# Altium PCB DACN.PcbDoc
Units mil, origin at the board's own origin, x right, y up, seen from the top; angles counter-clockwise.
Board outline 4210.03 x 2570.03 mil, 2 copper layers (Top Layer, Bottom Layer); 54 components, 48 nets, 231 pads, 0 vias.
Unrouted connection lines stored in the file: 10.
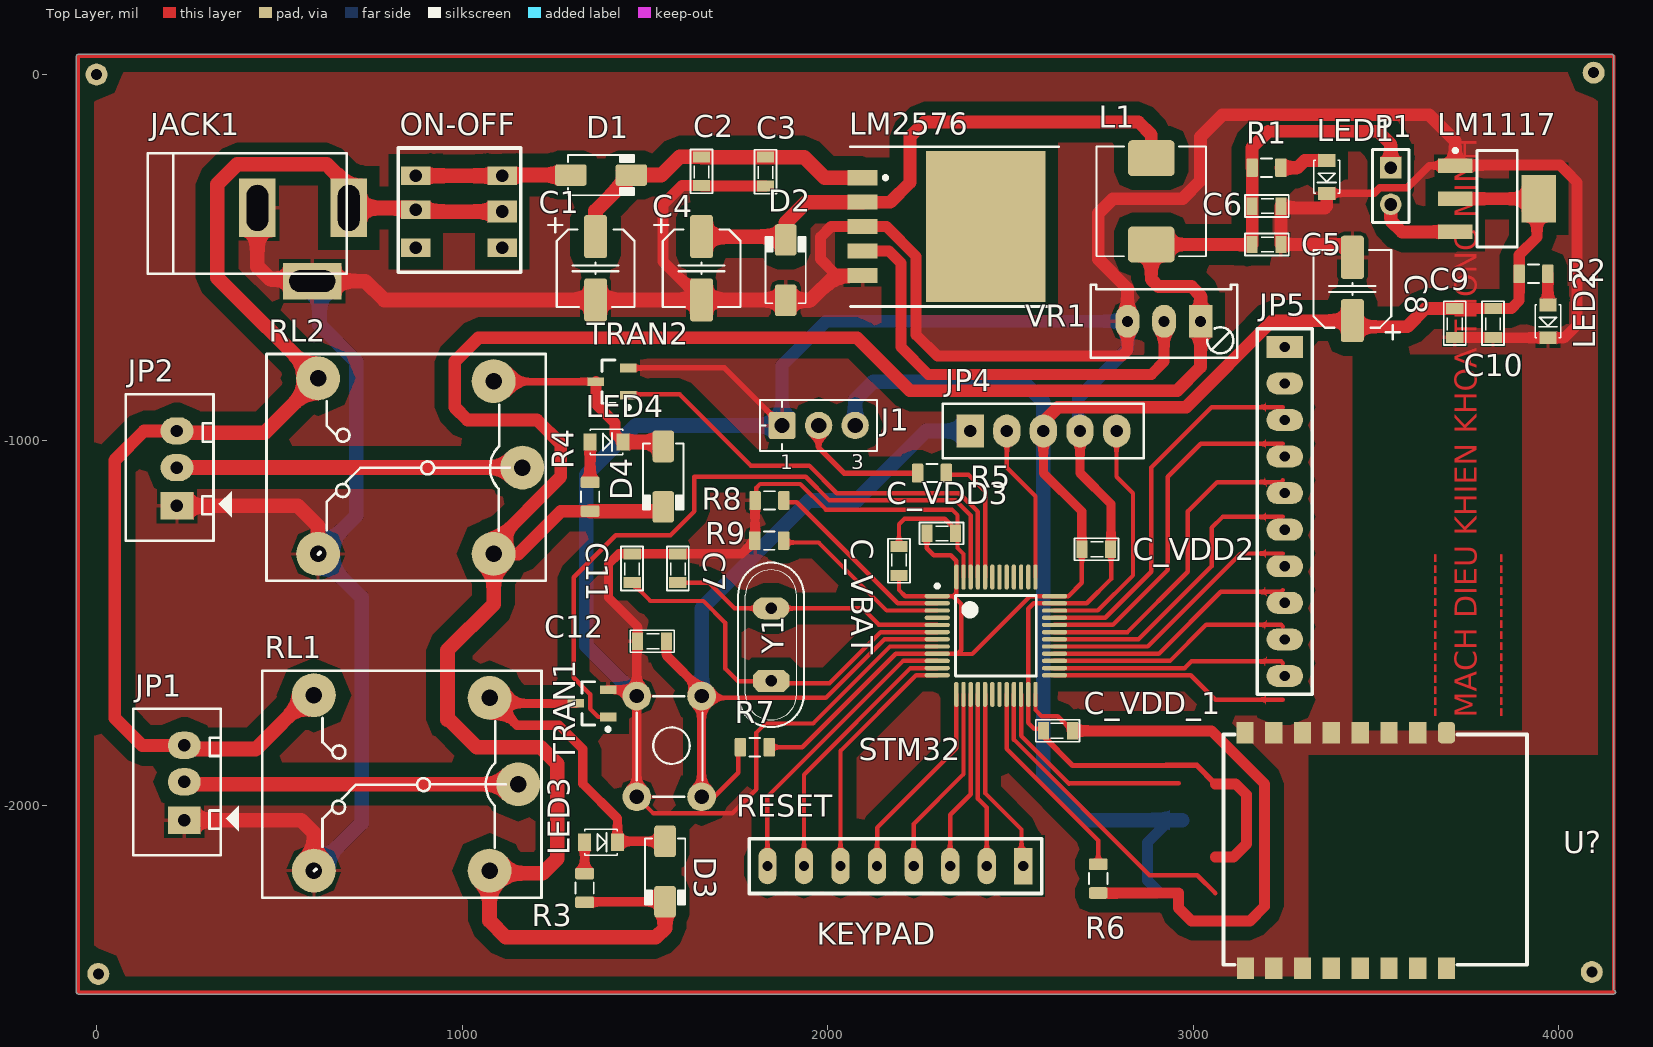
[diagram p0: Top Layer view]
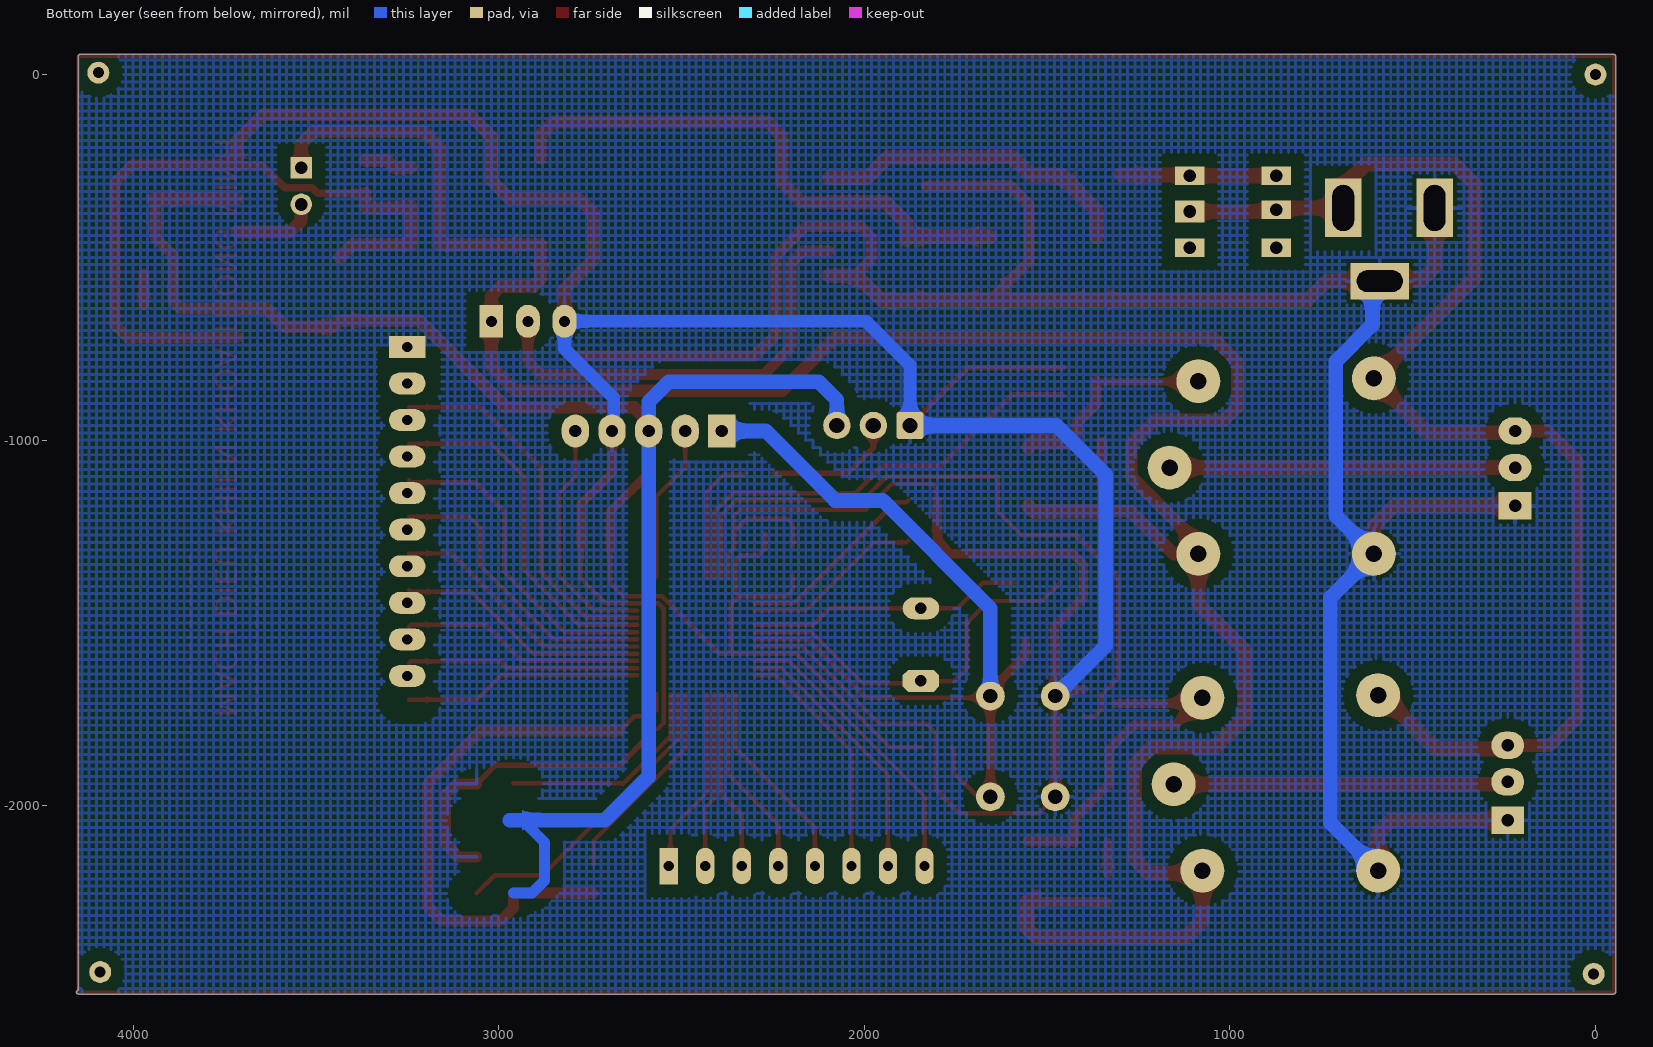
[diagram p1: Bottom Layer view, seen from below]
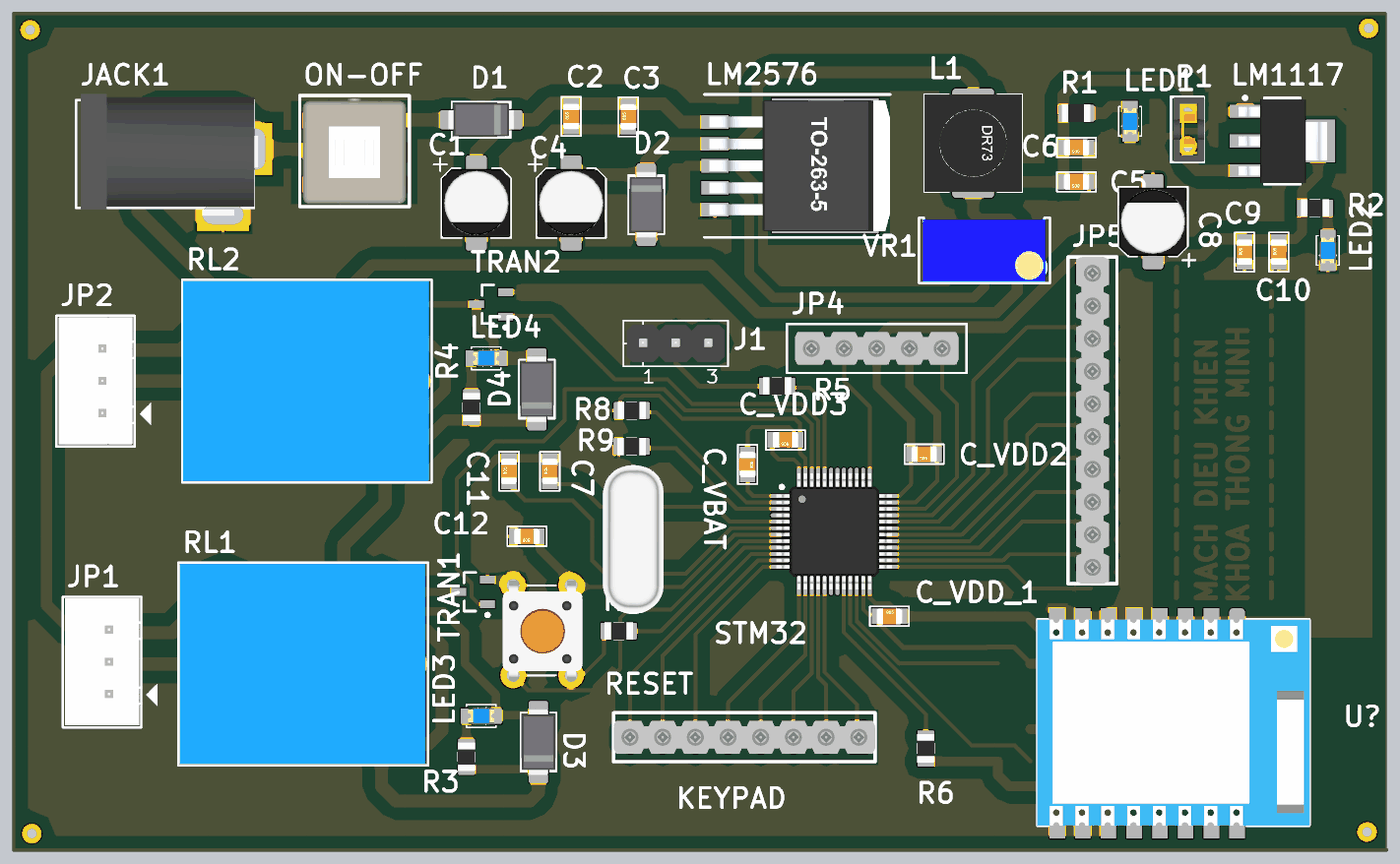
[diagram p2: 3D render of the assembled board from above, using the file's embedded part models]

## Layer stack, top to bottom
Top Solder: solder mask 0.4, Solder Resist, Dk 3.5
Top Layer: signal copper 1.4
Dielectric 1: dielectric 12.6, FR-4, Dk 4.8
Bottom Layer: signal copper 1.4
Bottom Solder: solder mask 0.4, Solder Resist, Dk 3.5

## Board outline
-50,-2515.01 cw(c-50,-2510) -55.01,-2510 -55.01,50 cw(c-50,50) -50,55.02 4145,55.02 cw(c4145,50) 4150.01,50 4150.01,49.94 ccw(c4145,50) 4150.02,50 4150.01,49.94 4150.02,-2504.99 cw(c4150,-2510) 4155.02,-2510 cw(c4150,-2510) 4150,-2515.01

## Design rules (kind name [scope] priority, off if disabled: settings)
Clearance [All] p1: gap=35 ignorepadtopadclearanceinfootprint=FALSE
PlaneConnect [All] p1: planeconnectstyle=Relief reliefexpansion=20 reliefentries=4 reliefconductorwidth=30 reliefairgap=10
PolygonConnect [All] p1: connectstyle=Relief reliefconductorwidth=10 reliefentries=4 polygonreliefangle="90 Angle" airgapwidth=10
RoutingVias [All] p1: holewidth=28 width=50 viastyle="Through Hole" minholewidth=28 minwidth=50 maxholewidth=28 maxwidth=50
SolderMaskExpansion [All] p1: expansion=4
Width [All] p1: maxlimit=30 minlimit=12 preferedwidth=30 toplayer_prefwidth=15 minimp=50.000000 maximp=50.000000 favimp=50.000000
29 further rules are at their usual default settings.

## Components (designator, comment, footprint, x,y, rotation, side; value= is the part's Value field where it differs from the comment)
C1 "10µF" CAP_ELEC_5x5.7 1365,-530 r90 top
C2 "105" SM-CAP-0805 1655,-310 r90 top value=0,1uF/300V
C3 "104" SM-CAP-0805 1830,-311 r90 top value=0,1uF/300V
C4 "10µF" CAP_ELEC_5x5.7 1655,-530 r90 top
C5 "105" SM-CAP-0805 3246,-465 r180 top value=0,1uF/300V
C6 "104" SM-CAP-0805 3246,-360 r180 top value=0,1uF/300V
C7 "20pF" SM-CAP-0805 1590,-1396 r90 top value=0,1uF/300V
C8 "10µF" CAP_ELEC_5x5.7 3435,-586.61 r270 top
C9 "105" SM-CAP-0805 3715,-725 r90 top value=0,1uF/300V
C10 "104" SM-CAP-0805 3820,-725 r90 top value=0,1uF/300V
C11 "20pF" SM-CAP-0805 1465,-1396 r90 top value=0,1uF/300V
C12 "100nF" SM-CAP-0805 1565,-1550 r180 top value=0,1uF/300V
C_VBAT "104" SM-CAP-0805 2195,-1285 r270 top value=0,1uF/300V
C_VDD2 "104" SM-CAP-0805 2780,-1298.5 r180 top value=0,1uF/300V
C_VDD3 "104" SM-CAP-0805 2356,-1255 r180 top value=0,1uF/300V
C_VDD_1 "104" SM-CAP-0805 2584,-1795 r0 top value=0,1uF/300V
D1 "Diode  1N4007" DO-214AC 1380,-275 r0 top value=1N4007
D2 "Diode  1N4007" DO-214AC 1885,-535 r90 top value=1N4007
D3 "Diode  1N4007" DO-214AC 1555,-2180 r270 top value=1N4007
D4 "Diode  1N4007" DO-214AC 1550,-1100 r270 top value=1N4007
J1 "CONN_HEADER_1x3P_0.100in" 1x3POS_HEADER 1975,-960 r90 top value="Single-row, 3 positions"
JACK1 "JACK DC" "JACK DC" 565,-465 r0 top value="Jac DC"
JP1 "JP3" CON3 240,-2035 r90 top value="Connector 3"
JP2 "JP3" CON3 220,-1175 r90 top value="Connector 3"
JP4 "JP5" jam5 2390,-975 r180 top value="Connector 5"
JP5 "JP 10" jam10 3250,-745 r270 top
KEYPAD "JP8" jam8 2535,-2165 r180 top value="Connector 8"
L1 "10µ" IND_WW_DR73 2885,-346.89 r270 top
LED1 "LED SMD" SM-LED-0805-Blue 3365,-235 r270 top
LED2 "LED SMD" SM-LED-0805-Blue 3970,-630 r270 top
LED3 "LED SMD" SM-LED-0805-Blue 1335,-2100 r0 top
LED4 "LED SMD" SM-LED-0805-Blue 1350,-1005 r0 top
LM1117 "LM1117-adj" SOT223-4N 3830.83,-340 r0 top value=LM317
LM2576 "LM2576S" TS5B 2266.1,-416.1 r270 top
ON-OFF "SW 6 PIN" SW6 1087,-475 r180 top
P1 "HEADER" "JUMPER PITCH 2 PIN" 3540,-255 r270 top
R1 "Jumper" RESC2012N_ZERO 3200,-255 r0 top value=1K
R2 "Jumper" RESC2012N_ZERO 3930.63,-545 r0 top value=1K
R3 "Jumper" RESC2012N_ZERO 1335,-2225 r90 top value=1K
R4 "Jumper" RESC2012N_ZERO 1350,-1155 r90 top value=1K
R5 "Jumper" RESC2012N_ZERO 2285,-1090 r0 top value=1K
R6 "Jumper" RESC2012N_ZERO 2740,-2199.37 r90 top value=1K
R7 "Jumper" RESC2012N_ZERO 1800.63,-1840 r0 top value=100K
R8 "Jumper" RESC2012N_ZERO 1840.63,-1165 r180 top value=10K
R9 "Jumper" RESC2012N_ZERO 1840,-1275 r180 top value=10K
RESET "SWITCH" "SW 4PIN" 1477.83,-1975.59 r90 top
RL1 "Relay" RL_SPDT_10A 1153.74,-1941.22 r180 top value="Relay SPDT, 10A, 12V"
RL2 "Relay" RL_SPDT_10A 1165,-1075 r180 top value="Relay SPDT, 10A, 12V"
STM32 "STM32F103C8T6-LQFP48" "LQFP 48 PIN" 2460,-1535 r0 top
TRAN1 "C1815" C1815 1355,-1720 r180 top
TRAN2 "C1815" C1815 1410,-840 r180 top
U? "ESP-07" ESP8266-07 3692.48,-1800 r270 top
VR1 "10K" VR1 3020,-675 r180 top
Y1 "8 MHz" "CRYSTAL DIP" 1845,-1560 r90 top

## Footprints (in the part's own frame and the unit in brackets; to place one, negate y for a bottom-side part, rotate by r counter-clockwise, add the part's x,y. Pads: shape width x height; smd on the part's side, far side on the other; paste and mask are expansions set on the pad)
1x3POS_HEADER [mil] "Connector Header, Single-row 3-position, 0.100\" pitch"
  rrect25% 75x75 hole 42: 1(0,100)
  round 75 hole 42: 2(0,0) 3(0,-100)
  silkscreen extent -70,-160 70,160, body extent -57,-150 57,150, height 335
C1815 [mm] "SOT23, 3-Leads, Body 2.9x1.3mm, Pitch 0.95mm, Lead Span 2.4mm, IPC Medium Density"
  rect 1.15x0.6 smd: 1(-1.125,0.95) 2(-1.125,-0.95) 3(1.125,0)
  silkscreen extent -1.25,-1.5 0.7,1.92, body extent -0.7,-1.5 0.7,1.5, height 1.14
CAP_ELEC_5x5.7 [mm] "Capacitor, polarized, aluminum can; 5x5.7mm DxH"
  round 0.508 on Mech15: 0(0,0)
  rrect25% 3x1.6 smd: 1(2.2,0) 2(-2.2,0)
  silkscreen extent -2.7,-2.7 3.5,3.3, body extent -2.65,-2.65 2.65,2.65, height 5.7
CON3 [mil] "CON 3 - Header White"
  rect 75x90 hole 34: 1(-5,0)
  oval 75x90 hole 34: 2(100,0) 3(200,0)
  silkscreen extent -100,-150 300,140, body extent -94,-94 296,133, height 276
"CRYSTAL DIP" [mm]
  oct 1.524x2.54 hole 0.8: 1(-2.5,0)
  oval 1.524x2.54 hole 0.8: 2(2.54,0)
  silkscreen extent -5.71,-2.29 5.71,2.29, body extent -5.63,-2.35 5.72,2.3, height 3.5
DO-214AC [mm] "JEDEC DO214 variation AC. SMA"
  round 0.508 on Mech15: 0(0,0)
  rrect25% 2.2x1.5 smd: A(-2.1,0) K(2.1,0)
  silkscreen extent -2.3,-1.4 2.3,1.4, body extent -2.6,-1.3 2.6,1.3, height 2.42
ESP8266-07 [mm]
  rrect50% 1.5x1.2 smd: 1(0,0)
  rect 1.5x1.2 smd: 2(0,-2) 3(0,-4) 4(0,-6) 5(0,-8) 6(0,-10) 7(0,-12) 8(0,-14) 9(16.383,-13.97) 10(16.383,-12) 11(16.383,-10) 12(16.383,-8) 13(16.383,-6) 14(16.383,-4) 15(16.383,-2) 16(16.383,0)
  silkscreen extent 0.13,-15.49 16.13,5.59, body extent 0.13,-15.55 16.13,5.65, height 3.6
IND_WW_DR73 [mm] "Wire-wound power inductor, Cooper Bussmann DR73 series, IPC Medium Density"
  round 0.5 on Mech15: 0(0,0)
  rrect25% 2.5x3.25 smd: 1(-3,0) 2(3,0)
  silkscreen extent -3.81,-3.81 3.81,3.81, body extent -3.8,-3.8 3.8,3.8, height 3.55
"JACK DC" [mil] "Jac DC input"
  rect 100x160 hole 59.06 slot 125.98 at 90 deg: 1(125,100) 2(-125,100)
  rect 160x100 hole 59.06 slot 125.98 at 0 deg: 3(25,-100)
  silkscreen extent -425,-80 120,250, body extent -410,-105 134,269, height 434
jam5 [mil]
  rect 75x90 hole 34: 1(0,0)
  oval 75x90 hole 34: 2(-100,0) 3(-200,0) 4(-300,0) 5(-400,0)
  silkscreen extent -475,-75 75,75, body extent -450,-50 50,50, height 704
jam8 [mil]
  rect 50x100 hole 28: 1(0,0)
  oval 50x100 hole 28: 2(100,0) 3(200,0) 4(300,0) 5(400,0) 6(500,0) 7(600,0) 8(700,0)
  silkscreen extent -50,-75 750,75, body extent -50,-50 750,50, height 704
jam10 [mil]
  rect 60x100 hole 28: 1(0,0)
  oval 60x100 hole 28: 2(100,0) 3(200,0) 4(300,0) 5(400,0) 6(500,0) 7(600,0) 8(700,0) 9(800,0) 10(900,0)
  silkscreen extent -50,-75 950,75, body extent -50,-50 950,50, height 704
"JUMPER PITCH 2 PIN" [mm] "Connector; Header; 2 Position"
  rect 1.5x1.5 hole 0.9: 1(0,0)
  round 1.5 hole 0.9: 2(2.54,0)
  silkscreen extent -1.27,-1.27 3.81,1.27, body extent -1.27,-1.27 3.81,1.33, height 7.6
"LQFP 48 PIN" [mm] "TSQFP, 48-Leads, Body 9.2x9.2mm (max), Pitch 0.50mm, IPC Medium Density"
  oval 1.75x0.3 smd: 1(-4.075,2.75) 2(-4.075,2.25) 3(-4.075,1.75) 4(-4.075,1.25) 5(-4.075,0.75) 6(-4.075,0.25) 7(-4.075,-0.25) 8(-4.075,-0.75) 9(-4.075,-1.25) 10(-4.075,-1.75) 11(-4.075,-2.25) 12(-4.075,-2.75) 25(4.075,-2.75) 26(4.075,-2.25) 27(4.075,-1.75) 28(4.075,-1.25) 29(4.075,-0.75) 30(4.075,-0.25) 31(4.075,0.25) 32(4.075,0.75) 33(4.075,1.25) 34(4.075,1.75) 35(4.075,2.25) 36(4.075,2.75)
  oval 0.3x1.75 smd: 13(-2.75,-4.075) 14(-2.25,-4.075) 15(-1.75,-4.075) 16(-1.25,-4.075) 17(-0.75,-4.075) 18(-0.25,-4.075) 19(0.25,-4.075) 20(0.75,-4.075) 21(1.25,-4.075) 22(1.75,-4.075) 23(2.25,-4.075) 24(2.75,-4.075) 37(2.75,4.075) 38(2.25,4.075) 39(1.75,4.075) 40(1.25,4.075) 41(0.75,4.075) 42(0.25,4.075) 43(-0.25,4.075) 44(-0.75,4.075) 45(-1.25,4.075) 46(-1.75,4.075) 47(-2.25,4.075) 48(-2.75,4.075)
  silkscreen extent -4.2,-2.8 2.8,3.57, body extent -4.5,-4.5 4.5,4.5, height 1.45
RESC2012N_ZERO [mm] "Chip Resistor, Body 2.0x1.2mm, 0805, IPC Medium Density"
  round 0.254 on Mech15: 0(0,0)
  rrect25% 0.8x1.3 smd: 1(-1,0) 2(1,0)
  Top Layer pour cut-out: -0.725,0.65 -0.525,0.85 0.525,0.85 0.725,0.65 0.725,-0.65 0.525,-0.85 -0.525,-0.85 -0.725,-0.65
  silkscreen extent -0.38,-0.64 0.38,0.64, body extent -1.1,-0.67 1.1,0.68, height 0.69
RL_SPDT_10A [mil] "Relay SPDT, 5 pin, 10A,W 650mil, L 800mil, H 800mil"
  round 120 hole 45: 1(0,0) 2(559.06,236.22) 3(559.06,-243.78) 4(78.74,-236.22) 5(78.74,236.22)
  silkscreen extent -63,-311 700,310, body extent -55,-306 697,304, height 602
SM-CAP-0805 [mil]
  rect 30x47.24 smd: 1(6,0) 2(85,0)
  silkscreen extent -15,-30 105,30, body extent 6,-25 84,25, height 31
SM-LED-0805-Blue [mm]
  rect 0.9x1.2 smd: 1(0,0) 2(2.286,0)
  silkscreen extent 0,-0.89 2.29,0.89, body extent 0.13,-0.62 2.15,0.63, height 1.1
SOT223-4N [mm] "SOT223, 4-Leads, Body 6.5x3.5mm, Pitch 2.3mm, Lead Span 7mm, IPC Medium Density"
  rect 2.4x1 smd: 1(-2.9,2.3) 2(-2.9,0) 3(-2.9,-2.3)
  rect 2.4x3.3 smd: 4(2.9,0)
  silkscreen extent -3.02,-3.35 1.4,3.47, body extent -3.39,-3.27 3.5,3.23, height 1.72
SW6 [mil]
  rect 80x50 hole 35: 1(-23,-1) 3(-23,-198) 4(214,-198) 5(214,-105) 6(214,-1)
  rect 80x60 hole 35: 2(-23,-100)
  silkscreen extent -73,-274 262,66, body extent -62,-265 252,57, height 524
"SW 4PIN" [mm] "SW button 4pin, 250 x250 mil"
  round 2 hole 1: 1(0,0) 1(7,0) 2(0,-4.5) 2(7,-4.5)
  silkscreen extent 0,-4.57 6.98,0, body extent -0.52,-5.39 7.38,0.81, height 7
TS5B [mm]
  rect 1.05x2.1 smd: 1(-3.399,-4.346) 2(-1.699,-4.346) 3(0.001,-4.346) 4(1.701,-4.346) 5(3.401,-4.346)
  rect 10.5x8.3 smd: 6(0,4.225)
  silkscreen extent -5.55,-5.18 5.55,9.28, body extent -5.08,-4.77 5.08,9.24, height 4.58
VR1 [mil] "Variable Resistor"
  rect 65x90 hole 30: 1(0,0)
  oval 65x90 hole 30: 2(100,0) 3(200,0)
  silkscreen extent -100,-100 301,100, body extent -87,-94 289,96, height 455

## Part data
C1 C4 C8: library part "CAP Aluminum"
  C1 C4: =470µF
  C8: =100µF
C2 C3 C5 C6 C7 C9 C10 C11 C12 C_VBAT C_VDD2 C_VDD3 C_VDD_1: library part "CAP SMD", Designed by=VanDungEvn
D1 D2 D3 D4: "Diode 1A"
J1: "Pin Header, THT, Single-row, 2.54mm pitch", Manufacturer 1=3M, Manufacturer Part Number 1=929647-09-36-I, Package / Case="Pin header; 2.54mm pitch", Category=Connectors, Mounting Type="Through Hole", Pitch="0.100\" (2.54mm)", QtyOverride=0.1, SCDType=undef, Terminal Block Type="Header, Male Pins, Single"
JP1 JP2: library part Con3, "Connector 3"
JP4: library part "jam 5", "jam 5"
JP5: library part "jam 10", "jam 10"
KEYPAD: library part "jam 8", "jam 8"
L1: library part INDC_10u_DR73-100-R, "Inductor Power 10µH 2.1A 7.6x7.6mm SMD", Manufacturer 1="Cooper Bussmann", Manufacturer Part Number 1=DR73-100-R, Package / Case=5.0x5.0x4.5mm, Ratings="2.1 A", Supplier Part Number 1=513-1129-1-ND, Tolerance=±20%, ComponentLink1Description=http://www.cooperindustries.com/content/dam/public/bussmann/Electronics/Resources/Data%20Sheets/Bus_Elx_DS_4315_DR_Series.pdf, ComponentLink1URL=http://www.cooperindustries.com/content/dam/public/bussmann/Electronics/Resources/Data%20Sheets/Bus_Elx_DS_4315_DR_Series.pdf, Material="ferrite shielded", SCDType=spec, Supplier 1=Digi-Key
LED1 LED2 LED3 LED4: library part "LED SMD 0805"
LM1117: "3v3"
LM2576: "Simple Switcher 3A Step Down Voltage Regulator", ComponentLink1Description="Manufacturer Link", ComponentLink1URL=http://www.national.com/, ComponentLink2Description=Datasheet, ComponentLink2URL=http://www.national.com/ds.cgi/LM/LM2576.pdf, ComponentLink3Description="URL Link1", ComponentLink3URL=http://www.national.com/pf/LM/LM2576.html, DatasheetVersion=Jun-1999, Note="Tab is connected to GND", PackageDescription="D2-PAK; 5 Leads; Body 14.4 (inc. leads) x 10.4 mm (LxW max)", PackageReference=TS5B, Published=15-Apr-2002, Publisher="Altium Limited"
P1: library part "HEADER CONNECT"
R1 R2 R3 R4 R5 R6 R7 R8 R9: library part RES_0805, "Resistor SMD chip 0.0 Ohm 0.125W 0805", Manufacturer 1="Samsung Electro-Mechanics America, Inc", Manufacturer 2="Stackpole Electronics Inc", Manufacturer 3=Yageo, Manufacturer 4="Panasonic Electronic Components", Manufacturer 5="Rohm Semiconductor", Manufacturer Part Number 1=RC2012J000CS, Manufacturer Part Number 2=RMCF0805ZT0R00, Manufacturer Part Number 3=RC0805JR-070RL, Manufacturer Part Number 4=ERJ-6GEY0R00V, Manufacturer Part Number 5=MCR10ERTJ000, Package / Case="0805 (2012 metric)", Ratings=1/8W, Supplier Part Number 1=1276-5466-6-ND, Tolerance=N/A, ComponentLink1Description=http://www.samsungsem.com/servlet/FileDownload?filename=productcatalog/pdf/Chip_Resistor.pdf, ComponentLink1URL=http://www.samsungsem.com/servlet/FileDownload?filename=productcatalog/pdf/Chip_Resistor.pdf, ComponentLink2Description=http://www.seielect.com/Catalog/SEI-RMCF_RMCP.pdf, ComponentLink2URL=http://www.seielect.com/Catalog/SEI-RMCF_RMCP.pdf, ComponentLink3Description=http://media.digikey.com/pdf/Data%20Sheets/Yageo%20PDFs/RC0805%20Pb%20Free.pdf, ComponentLink3URL=http://media.digikey.com/pdf/Data%20Sheets/Yageo%20PDFs/RC0805%20Pb%20Free.pdf, ComponentLink4Description=http://industrial.panasonic.com/www-cgi/jvcr13pz.cgi?E+PZ+3+AOA0001+ERJ6GEY0R00V+7+WW, ComponentLink4URL=http://industrial.panasonic.com/www-cgi/jvcr13pz.cgi?E+PZ+3+AOA0001+ERJ6GEY0R00V+7+WW, ComponentLink5Description=http://rohmfs.rohm.com/en/products/databook/datasheet/passive/resistor/chip_resistor/mcr_g.pdf, ComponentLink5URL=http://rohmfs.rohm.com/en/products/databook/datasheet/passive/resistor/chip_resistor/mcr_g.pdf, RoHS 1="RoHS Compliant", RoHS 2="RoHS Compliant", RoHS 3="RoHS Compliant", RoHS 4="RoHS Compliant", RoHS 5="RoHS Compliant", SCDType=spec, Supplier 1=Digi-Key, Supplier 2=Digi-Key, Supplier 3=Digi-Key, Supplier 4=Digi-Key, Supplier 5=Digi-Key, Supplier Part Number 2=RMCF0805ZT0R00DKR-ND, Supplier Part Number 3=311-0.0ARDKR-ND, Supplier Part Number 4=P0.0ADKR-ND, Supplier Part Number 5=RHM0.0CPDKR-ND
RL1 RL2: library part "Relay SRD", "Relay SPDT 5 Pin", ="Relay SPDT, 10A, 24V"
TRAN1 TRAN2: "NPN 600mW, ECB", =C2383
VR1: library part VR, "Var Resistor RM065", RM065-103=1K, RM065-104=10K, RM065-503=5K
Y1: library part Crystal, LatestRevisionDate=17-Jul-2002, LatestRevisionNote="Re-released for DXP Platform.", PackageReference=R38, Published=8-Jun-2000, Publisher="Altium Limited"
RESET: LatestRevisionDate=17-Jul-2002, LatestRevisionNote="Re-released for DXP Platform.", PackageReference=SPST-2, Published=24-Mar-1999, Publisher="Altium Limited"
STM32: ComponentLink1Description="Manufacturer Link", ComponentLink1URL=www.st.com/stm32, ComponentLink2Description=Datasheet, ComponentLink2URL=http://www.st.com/stonline/products/literature/ds/13586.pdf, DatasheetVersion="rev6, Mar-2008", PackageDescription="48-Pin Low-Profile Quad Flat Pack, 7 x 7 mm Body, 0.5 mm Pitch (LQFP48)", PackageReference=LQFP48, PackageVersion=Mar-2008, Published=30-May-2008, Publisher="Altium Limited"

## Free pads (board coordinates)
  round 60 hole 30: 14(4095,5) 15(4090,-2455) 16(5,-2460) 20(0,0)

## Nets (pads, with @x,y where several pads share a name; then routed paths per layer and width w, separated by ;. In a path a pad name is that pad's centre, name@x,y a point inside that pad or via, vN(x,y) a via of type N, cw(c..) or ccw(c..) an arc to the next point about the centre after c; other vN are vias at no path point)
+3.3V: C8.1 C9.2 C10.2 C_VBAT.2 C_VDD2.2 C_VDD3.2 C_VDD_1.2 J1.3 JP4.3 LM1117.2 LM1117.4 R2.1 R6.1 R7.2 STM32.1 STM32.9 STM32.24 STM32.36 STM32.48 | length 8096.8
  Top Layer w12: R7.2 1930,-1840 2185.79,-1584.21 STM32.9 2355.79,-1584.21 ; C_VBAT.2 2195,-1410 2211.73,-1426.73 STM32.1 2343.27,-1426.73 ; C_VDD3.2 2271,-1296 2290,-1315 2336.73,-1315 2351.73,-1330 STM32.48 2351.73,-1418.27 2343.27,-1426.73 ; STM32.24 2568.27,-1738.27 2585,-1755 2629,-1755 C_VDD_1.2 ; C_VDD2.2 2695,-1390 2658.27,-1426.73 STM32.36 2553.27,-1426.73 2395,-1585 2356.57,-1585 2355.79,-1584.21 ; 2343.27,-1426.73 2365,-1448.46 2365,-1575 2355.79,-1584.21
  Top Layer w25: JP4.3 2590,-1090 2695,-1195 C_VDD2.2
  Top Layer w30: C_VDD_1.2 3050,-1795 3195,-1940 3195,-2275 3155,-2315 2995,-2315 2960,-2280 2960,-2239 2740.37,-2239 R6.1@2740,-2239.37 ; C9.2 C10.2 3870,-640 3891.26,-618.74 R2.1 3891.26,-493.74 3940,-445 3940,-345 LM1117.4
  Top Layer w35: JP4.3 2590,-950 2630,-910 2980,-910 3216.77,-673.23 C8.1 3451.77,-690 3585,-690 3635,-640 C9.2 ; LM1117.2 LM1117.4
  Bottom Layer w30: 2935.5,-2039.5 2875,-2100 2875,-2205 2909,-2239 2960,-2239
  Bottom Layer w40: J1.3 2075,-890 2125,-840 2535,-840 2590,-895 JP4.3 2590,-1920 2709.5,-2039.5 2935.5,-2039.5 2960,-2039.5 2970,-2039.5
+12V: JACK1.1 JP1.3 JP2.3 ON-OFF.2 ON-OFF.5 RL1.3 RL2.3 | length 3537.9
  Top Layer w35: JP2.3 130,-975 50,-1055 50,-1760 125,-1835 JP1.3
  Top Layer w40: JP2.3 225,-980 460,-980 605.94,-834.06 RL2.3 330,-555.28 330,-299.75 384.75,-245 630,-245 690,-305 JACK1.1 868,-365 ON-OFF.5 878,-375 ON-OFF.2 ; JP1.3 250,-1845 435,-1845 582.56,-1697.44 RL1.3
Boot0: R5.2 STM32.44 | length 361.1
  Top Layer w12: R5.2 2329.37,-1095 2385,-1095 2430.47,-1140.47 STM32.44
BOOT1: R6.2 STM32.20 | length 568.3
  Top Layer w12: STM32.20 2489.53,-1844.53 2740,-2095 R6.2
ESP_RX: STM32.21 | length 848.4
  Top Layer w12: STM32.21 2509.21,-1819.21 2880,-2190 3011,-2190 3060,-2239
ESP_TX: STM32.22 | length 599.3
  Top Layer w12: STM32.22 2528.9,-1808.9 2660,-1940 2661,-1939 2960,-1939
GND: C1.2 C2.1 C3.1 C4.2 C5.1 C6.1 C7.2 C8.2 C9.1 C10.1 C11.2 C12.2 C_VBAT.1 C_VDD2.1 C_VDD3.1 C_VDD_1.1 D2.A J1.1 JACK1.2 JACK1.3 JP1.1 JP2.1 JP4.4 LED1.2 LED2.2 LM1117.1 LM2576.3 LM2576.5 R8.2 R9.2 RESET.1 RL1.2 RL2.2 STM32.8 STM32.23 STM32.35 STM32.47 TRAN1.2 TRAN2.2 VR1.3 | length 18770.1
  Top Layer w12: RESET.1@1477.83,-1975.59 1523.2,-2020.96 1739.04,-2020.96 1805,-1955 1805,-1800 1830,-1775 1960,-1775 2170.47,-1564.53 STM32.8 ; R8.2 1805,-1161.26 1805,-1130 1815,-1120 1925,-1120 1995,-1190 2340,-1190 2355,-1205 C_VDD3.1@2355,-1245 ; C_VBAT.1 2195,-1230 2210,-1215 2320,-1215 2350,-1245 C_VDD3.1@2355,-1245 ; STM32.47 2371.42,-1311.42 2355,-1295 C_VDD3.1@2355,-1245 ; C_VDD_1.1 2585,-1790 2565,-1790 2548.58,-1773.58 STM32.23 2548.58,-1461.42 2563.58,-1446.42 STM32.35 2708.58,-1446.42 2775,-1380 C_VDD2.1@2775,-1290
  Top Layer w15: TRAN2.2 1717.6,-802.6 J1.1 ; C_VDD_1.1 2590,-1810 2670,-1890 2926,-1890 2926.5,-1889.5 3009.5,-1889.5 3060,-1940
  Top Layer w20: LED1.2 3495,-325 3510,-310 3585,-310 3645.55,-249.45 LM1117.1
  Top Layer w25: TRAN1.2 1460.43,-1682.6 RESET.1@1477.83,-1700 ; RESET.1@1477.83,-1975.59 RESET.1@1477.83,-1700 ; R8.2 1801.26,-1274.37 R9.2 1764.63,-1311 C7.2 C11.2 1429,-1311 1400,-1340 1400,-1430 1480,-1510 C12.2 1477.83,-1552.17 RESET.1@1477.83,-1700 ; JP4.4 2690,-1090 2775,-1175 C_VDD2.1@2775,-1290
  Top Layer w30: C4.2 1550,-511.61 1550,-355 1601,-304 C2.1 1656,-305 C3.1 ; 2020,-550 2020,-545 1980,-505 1980,-445 2008.86,-416.14 LM2576.3 2160.54,-416.14 2242.05,-497.66 2242.05,-712.05 2300,-770 2805,-770 2820,-755 VR1.3 ; 3060,-2140 3110,-2140 3145,-2105 3145,-1970 3115,-1940 3060,-1940 ; C9.1 C10.1 3821,-720 LED2.2 4015,-720 4050,-685 4050,-295 4019.24,-264.24 4019.24,-263.86 4003.43,-248.04 LM1117.1@3716.65,-248.04
  Top Layer w35: VR1.3 2820,-585 2740,-505 2740,-380 2780,-340 2970,-340 3020,-290 3020,-170 3080,-110 3645,-110 3716.65,-181.65 3716.65,-248.04 LM1117.1 ; LED1.2 3365,-360 3360,-365 3245,-365 C6.1 C5.1 3400,-465 C8.2
  Top Layer w40: JP2.1 550,-1180 605.94,-1235.94 RL2.2 ; JP1.1 560,-2040 595,-2075 595,-2177.13 RL1.2 ; JACK1.2 440,-525 475,-560 585,-560 JACK1.3 735,-565 786.61,-616.61 C1.2 C4.2 1883.94,-616.61 D2.A 1952.32,-617.68 2020,-550 LM2576.5
  Bottom Layer w35: J1.1 1875,-795 1995,-675 VR1.3 2820,-750 2685,-885 2685,-970 JP4.4
  Bottom Layer w40: JACK1.3 610,-585 610,-685 710,-785 710,-1207.17 RL2.2 724.72,-1430 725,-1430 725,-2047.13 RL1.2 ; RESET.1@1477.83,-1700 1340,-1562.17 1340,-1095 1475,-960 J1.1
JTCK: JP4.2 STM32.37 | length 432
  Top Layer w12: JP4.2 2490,-1075 2568.27,-1153.27 STM32.37
JTMS: JP4.5 STM32.34 | length 668
  Top Layer w12: STM32.34 2738.9,-1466.1 2835,-1370 2835,-1145 2790,-1100 JP4.5
NetC1_1: C1.1 C2.2 C3.2 D1.K LM2576.1 | length 885.6
  Top Layer w40: C1.1 1365,-372.68 D1.K 1545,-275 1595,-225 C2.2 1656,-226 C3.2 1936,-226 1992.28,-282.28 LM2576.1
NetC4_1: C4.1 D2.K L1.1 LM2576.2 | length 1546.4
  Top Layer w35: LM2576.2 2170.79,-349.21 2225,-295 2225,-170 2265,-130 2850,-130 2885,-165 L1.1
  Top Layer w40: C4.1 1876.06,-443.39 D2.K 1885,-405 1940.79,-349.21 LM2576.2
NetD3_A: D3.A LED3.2 RL1.4 TRAN1.3 | length 959.2
  Top Layer w25: RL1.4 RL1.4@1090,-1720 ; TRAN1.3 RL1.4@1090,-1720 ; D3.A 1427.68,-2097.32 LED3.2 1425,-2035 1330,-1940 1330,-1845 1265,-1780 1150,-1780 RL1.4@1090,-1720
NetD4_A: D4.A LED4.2 RL2.4 TRAN2.3 | length 590.8
  Top Layer w20: RL2.4 1087.48,-840 TRAN2.3
  Top Layer w30: TRAN2.3 1365.71,-900.71 1417.72,-952.72 1417.72,-982.72 LED4.2
  Top Layer w40: LED4.2 1537.68,-1005 D4.A
NetJ1_2: J1.2 R5.1 | length 359.6
  Top Layer w15: J1.2 1975,-1020 2045,-1090 R5.1
NetJP1_2: JP1.2 RL1.1 | length 916.3
  Top Layer w40: JP1.2 246.22,-1941.22 RL1.1
NetJP2_2: JP2.2 RL2.1 | length 945
  Top Layer w40: JP2.2 RL2.1
NetLED1_1: LED1.1 R1.2 | length 133.9
  Top Layer w35: R1.2 3285,-255 3305,-235 LED1.1
NetLED2_1: LED2.1 R2.2 | length 85
  Top Layer w30: LED2.1 R2.2
NetLED3_1: LED3.1 R3.2 | length 85.6
  Top Layer w25: R3.2 LED3.1
NetLED4_1: LED4.1 R4.2 | length 110.6
  Top Layer w30: R4.2 LED4.1
NetLM1117_3: LM1117.3 P1.2 | length 234.3
  Top Layer w35: P1.2 3540,-400 3570.55,-430.55 LM1117.3
NetLM2576_4: LM2576.4 VR1.2 | length 1223.8
  Top Layer w30: LM2576.4 2168.07,-483.07 2200.05,-515.05 2200.05,-745.05 2275,-820 2885,-820 2920,-785 VR1.2
NetR8_1: R8.1 STM32.2 | length 536.1
  Top Layer w12: R8.1 1885,-1170 1915,-1170 2191.42,-1446.42 STM32.2
NetR9_1: R9.1 STM32.3 | length 499.4
  Top Layer w12: R9.1 1884.37,-1280 1975,-1280 2161.1,-1466.1 STM32.3
NRST: C12.1 JP4.1 R7.1 RESET.2 STM32.7 | length 2545.2
  Top Layer w12: RESET.2@1655,-1700 1660,-1705 1995,-1705 2155.16,-1544.84 STM32.7 ; RESET.2@1670,-1975.59 1689.41,-1975.59 1755,-1910 1755,-1846.26 R7.1
  Top Layer w25: C12.1 1559,-1589 1655,-1685 1655,-1700 1655,-1960.59 RESET.2@1670,-1975.59
  Bottom Layer w40: RESET.2@1655,-1700 1655,-1460 1950,-1165 2080,-1165 2270,-975 JP4.1
OSC_IN: C7.1 STM32.5 Y1.2 | length 757.4
  Top Layer w12: C7.1 1675,-1390 1745,-1460 Y1.2 2095,-1460 2140,-1505 2145,-1505 2145.47,-1505.47 STM32.5
OSC_OUT: C11.1 STM32.6 Y1.1 | length 1080.9
  Top Layer w12: C11.1 1515,-1440 1660,-1440 1720,-1500 1720,-1625 1755,-1660 1843.43,-1660 Y1.1 1851.57,-1665 2005,-1665 2144.84,-1525.16 STM32.6
PA0: KEYPAD.8 STM32.10 | length 815.4
  Top Layer w12: KEYPAD.8@1840,-2160 KEYPAD.8 1835,-1975 2206.1,-1603.9 STM32.10
PA1: KEYPAD.7 STM32.11 | length 739.4
  Top Layer w12: KEYPAD.7 1930,-2160 1935,-2155 1935,-1915 2226.42,-1623.58 STM32.11
PA2: KEYPAD.6 STM32.12 | length 667.7
  Top Layer w12: KEYPAD.6 2031.97,-2161.97 2035,-2158.94 2035,-1850 2241.73,-1643.27 STM32.12
PA3: KEYPAD.5 STM32.13 | length 559.3
  Top Layer w12: KEYPAD.5 2135,-2060 2351.73,-1843.27 STM32.13
PA4: KEYPAD.4 STM32.14 | length 526.1
  Top Layer w12: KEYPAD.4 2235,-2050 2371.42,-1913.58 STM32.14
PA5: KEYPAD.3 STM32.15 | length 492.8
  Top Layer w12: KEYPAD.3 2335,-2025 2391.1,-1968.9 STM32.15
PA6: KEYPAD.2 STM32.16 | length 479.6
  Top Layer w12: STM32.16 2410.79,-1980.79 2435,-2005 KEYPAD.2
PA7: KEYPAD.1 STM32.17 | length 512.9
  Top Layer w12: STM32.17 2430.47,-1965.47 2530,-2065 2530,-2160 KEYPAD.1
PA8: JP5.6 STM32.29 | length 730
  Top Layer w12: STM32.29 2875.47,-1564.53 3130,-1310 3245,-1310
PA11: JP5.3 STM32.32 | length 979.2
  Top Layer w12: STM32.32 2779.53,-1505.47 2930,-1355 2930,-1100 3020,-1010 3245,-1010
PA12: JP5.2 STM32.33 | length 1030
  Top Layer w12: STM32.33 2759.21,-1485.79 2885,-1360 2885,-1075 3050,-910 3245,-910
PB12: JP5.10 STM32.25 | length 652.2
  Top Layer w12: STM32.25 2993.27,-1643.27 3060,-1710 3245,-1710
PB13: JP5.9 STM32.26 | length 634.3
  Top Layer w12: STM32.26 2976.42,-1623.58 2995,-1605 3240,-1605 3245,-1610
PB14: JP5.8 STM32.27 | length 667.6
  Top Layer w12: STM32.27 2936.1,-1603.9 3035,-1505 3240,-1505 3245,-1510
PB15: JP5.7 STM32.28 | length 696.7
  Top Layer w12: STM32.28 2905.79,-1584.21 3075,-1415 3240,-1415 3245,-1410
ReLay1: STM32.46 TRAN1.1 | length 1908.7
  Top Layer w12: TRAN1.1@1396.89,-1755 TRAN1.1 1372.4,-1757.4 1350,-1735 1350,-1695 1305,-1650 1305,-1375 1420,-1260 1570,-1260 1635,-1195 1635,-1100 1940,-1100 2005,-1165 2350,-1165 2391.1,-1206.1 STM32.46
Relay2: STM32.45 TRAN2.1 | length 1269.1
  Top Layer w12: TRAN2.1 1456.69,-875 1595,-875 1790,-1070 1950,-1070 2025,-1145 2360,-1145 2410.79,-1195.79 STM32.45
UART1_RX: JP5.4 STM32.31 | length 893.2
  Top Layer w12: STM32.31 2819.84,-1525.16 2985,-1360 2985,-1195 3065,-1115 3240,-1115 3245,-1110
UART1_TX: JP5.5 STM32.30 | length 824.8
  Top Layer w12: STM32.30 2850.16,-1544.84 3050,-1345 3050,-1240 3080,-1210 3245,-1210
"V ON": D1.A ON-OFF.3 ON-OFF.4 | length 425.2
  Top Layer w40: ON-OFF.4 ON-OFF.3 1112,-275 D1.A
VADJ: C5.2 C6.2 D3.K D4.K L1.2 P1.1 R1.1 R3.1 R4.1 RL1.5 RL2.5 VR1.1 | length 7228.9
  Top Layer w25: R3.1 1336.69,-2262.68 D3.K
  Top Layer w30: D3.K@1528.94,-2243.74 D3.K@1530,-2242.68
  Top Layer w35: R4.1 1270.63,-1194.37 1153.78,-1311.22 RL2.5 1086.26,-1283.74 1270,-1100 1270,-1010 1205,-945 1015,-945 980,-910 980,-785 1045,-720 2080,-720 2225,-865 2955,-865 3020,-800 VR1.1 3020,-605 2995,-580 2905,-580 2885,-560 L1.2 C5.2 C6.2 3161,-255.37 R1.1 3160.63,-199.37 3205,-155 3505,-155 3540,-190 P1.1
  Top Layer w40: RL2.5 1086.26,-1448.74 960,-1575 960,-1765 965,-1765 1040,-1840 1215,-1840 1260,-1885 1260,-2145 1220,-2185 1082.56,-2185 RL1.5 1075,-2315 1120,-2360 1530,-2360 1555,-2335 D3.K ; R4.1 1538.31,-1194.37 D4.K
pads on no net: C1.0 C4.0 C8.0 D1.0 D2.0 D3.0 D4.0 JP5.1 L1.0 LM2576.6 ON-OFF.1 ON-OFF.6 R1.0 R2.0 R3.0 R4.0 R5.0 R6.0 R7.0 R8.0 R9.0 STM32.4 STM32.18 STM32.19 STM32.38 STM32.39 STM32.40 STM32.41 STM32.42 STM32.43 U?.1 U?.2 U?.3 U?.4 U?.5 U?.6 U?.7 U?.8 U?.9 U?.10 U?.11 U?.12 U?.13 U?.14 U?.15 U?.16
copper on no net: | length 13520
  Top Layer w10: -50,-2510 130,-2510 4150,-2510 4150,50 115,50 -50,50 -50,-115 -50,-2330 -50,-2510

## Polygon pours and split planes (outlines as drawn)
GND on Bottom Layer "GND_BOTTOM" (hatched 90Degree grid 20 track 8, pour order 2): 4145,50 4150,-2510 -50,-2504.99 -50,50
GND on Top Layer "Top-GND" (solid, pour order 3): -40,50 -35,45 4135,45 4135,-2495 4140,-2500 -50,-2500 -50,50

## Other copper
Top Layer:
  pour cut-out: 3315,-1860 3315,-2490 3395,-2490 3400,-2485 4125,-2485 4125,-1860
  pour cut-out: 1210,-1450
  text "--------------- / MACH DIEU KHIEN KHOA THONG MINH / ---------------" at 3865,-1760 h60 r90

## Text inside footprints (layer, text, board x,y; h text height)
J1: Top Overlay "3" at 2065,-1080 h40; Top Overlay "1" at 1870,-1080 h40